# Altium PCB Tailsitter_pcb.PcbDoc
Units mm, origin at the board's own origin, x right, y up, seen from the top; angles counter-clockwise.
Board outline 55.99 x 40.07 mm, 2 copper layers (Top Layer, Bottom Layer); 65 components, 78 nets, 363 pads, 51 vias.
Unrouted connection lines stored in the file: 91.
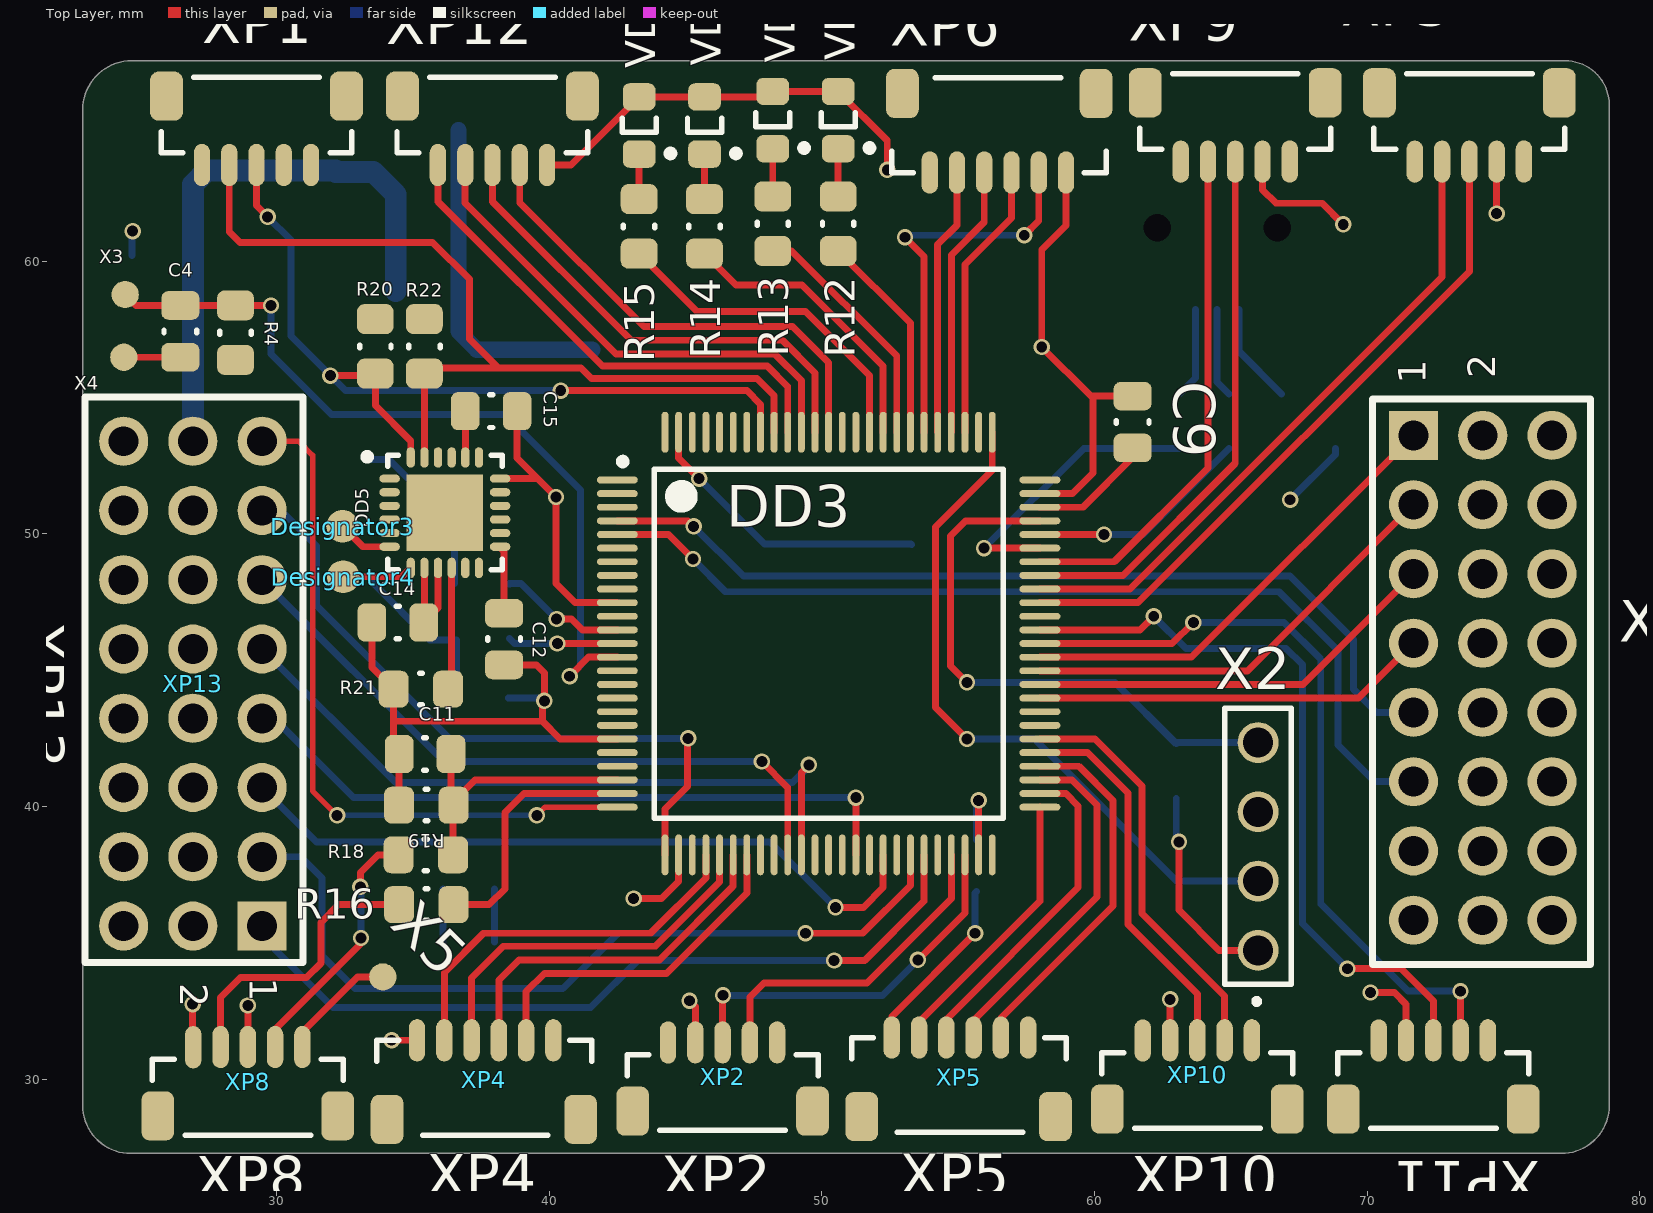
[diagram p0: Top Layer view]
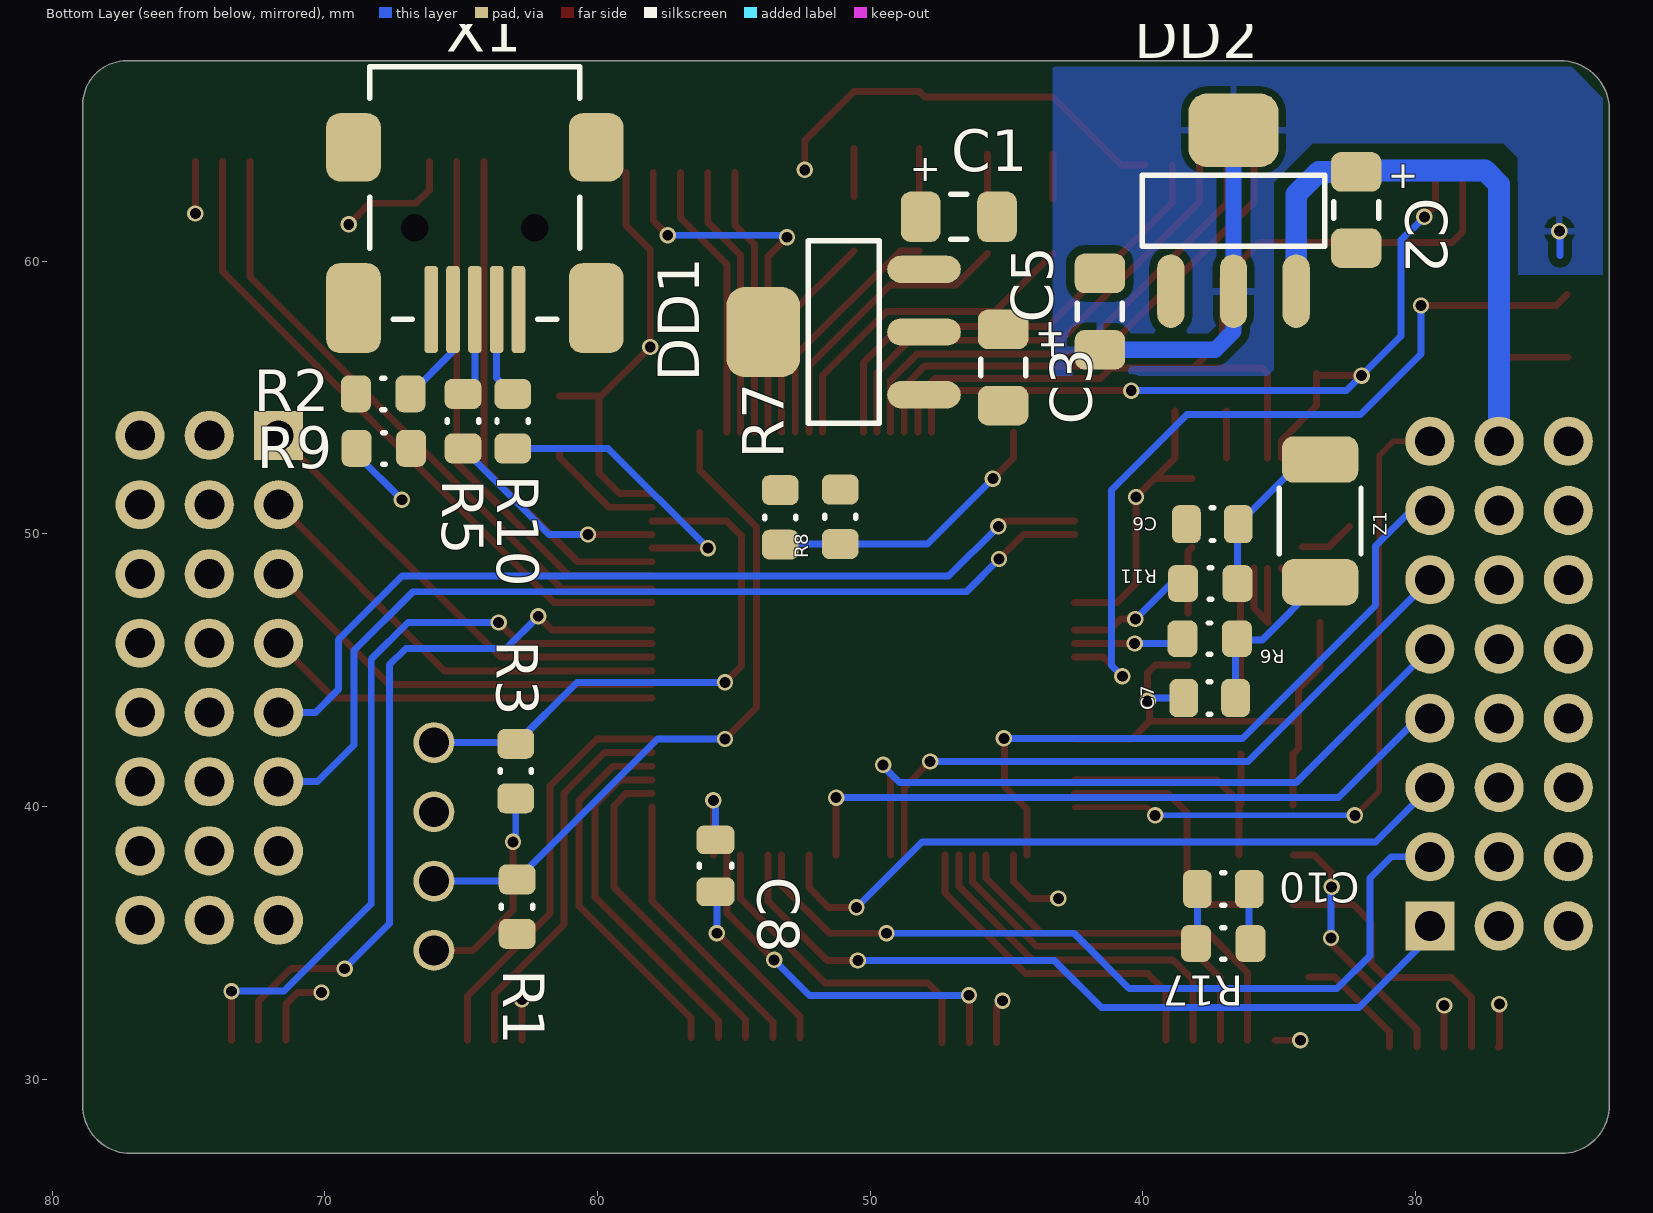
[diagram p1: Bottom Layer view, seen from below]

## Layer stack, top to bottom
Top Solder: solder mask 0.0102, Solder Resist, Dk 3.5
Top Layer: signal copper 0.0356
Dielectric 1: dielectric 0.32, FR-4, Dk 4.8
Bottom Layer: signal copper 0.0356
Bottom Solder: solder mask 0.0102, Solder Resist, Dk 3.5

## Board outline
24.663,27.275 cw(c24.65,29.03) 22.895,29.043 22.9,29.03 22.9,65.556 22.895,65.544 cw(c24.688,65.556) 24.701,67.35 24.688,67.35 77.263,67.35 77.252,67.35 cw(c77.263,65.734) 78.88,65.722 78.875,65.734 78.875,29.03 78.88,29.043 cw(c77.125,29.03) 77.112,27.275 77.125,27.275

## Design rules (kind name [scope] priority, off if disabled: settings)
Clearance Clearance_3 [InNamedPolygon('+5V_Bottom')] p1: gap=0.3 ignorepadtopadclearanceinfootprint=FALSE
Clearance Clearance_2 [InNamedPolygon('Bottom Layer-No Net')] p2: gap=0.15 ignorepadtopadclearanceinfootprint=FALSE
Clearance Clearance_1 [InNamedPolygon('GND_L02_P002')] p3: gap=0.25 ignorepadtopadclearanceinfootprint=FALSE
Clearance My_Clearance_Rules [InNet('No Net')] p4: gap=0.15 ignorepadtopadclearanceinfootprint=FALSE except(0.5: Arc-Fill Arc-Poly Arc-Region Track-Fill Track-Poly Track-Region SMDPad-Fill SMDPad-Poly SMDPad-Region THPad-Fill THPad-Poly THPad-Region Via-Fill Via-Poly Via-Region Fill-Fill Fill-Poly Fill-Region Fill-Hole Poly-Poly Poly-Region Poly-Hole Region-Region Region-Hole)
Clearance [All] p5 off: gap=0.254 ignorepadtopadclearanceinfootprint=FALSE except(0: Arc-Hole Track-Hole SMDPad-Hole THPad-Hole Via-Hole Fill-Hole Poly-Hole Region-Hole Text-Hole)
PolygonConnect [All] p1: connectstyle=Relief reliefconductorwidth=0.254 reliefentries=4 polygonreliefangle="90 Angle" airgapwidth=0.254
RoutingVias [All] p1: holewidth=0.4 width=0.6 viastyle="Through Hole" minholewidth=0.4 minwidth=0.6 maxholewidth=0.4 maxwidth=0.6
SolderMaskExpansion [All] p1: expansion=0.102
Width [InNet('No Net')] p1: maxlimit=0.254 minlimit=0.1 preferedwidth=0.254 toplayer_prefwidth=0.25 bottomlayer_minwidth=0.254 minimp=50.000000 maximp=50.000000 favimp=50.000000
30 further rules are at their usual default settings.

## Classes and differential pairs
component class Designator: C1 C2 C3 C4 C5 C6 C7 C8 C9 C10 C11 DD1 DD2 DD3 R1 R2 R3 R4 R5 R6 R7 R8 R9 R10 R11 R12 R13 R14 R15 R16 R17 R18 R19 VD1 VD2 VD3 VD4 X1 X2 X3 X4 XP1 XP2 XP3 XP4 XP5 XP6 XP7 XP8 XP9 XP10 XP11 XP12 XP13 Z1

## Components (designator, comment, footprint, x,y, rotation, side; value= is the part's Value field where it differs from the comment)
C1 "Cap El Case A (Tantalum)" "CAP CASE A" 46.75,61.625 r180 bottom
C2 "Cap El Case A (Tantalum)" "CAP CASE A" 32.175,61.875 r270 bottom
C3 "Cap El Case A (Tantalum)" "CAP CASE A" 45.125,56.1 r270 bottom
C4 "Cap EIA 0805" "CAP EIA 0805" 26.475,57.425 r90 top
C5 "Cap El Case A (Tantalum)" "CAP CASE A" 41.575,58.15 r90 bottom
C6 "Cap EIA 0805" "CAP EIA 0805" 37.45,50.354 r0 bottom
C7 "Cap EIA 0805" "CAP EIA 0805" 37.55,43.975 r0 bottom
C8 "Cap EIA 0805" "CAP EIA 0805" 55.675,37.825 r90 bottom value=2.2uF
C9 "Cap EIA 0805" "CAP EIA 0805" 61.4,54.1 r270 top value=2.2uF
C10 "Cap EIA 0805" "CAP EIA 0805" 37.05,36.975 r0 bottom value=100nF
C11 "Cap EIA 0805" "CAP EIA 0805" 35.45,41.925 r180 top
C12 "" "CAP EIA 0805" 38.35,46.14 r270 top
C14 "" "CAP EIA 0805" 34.45,46.75 r180 top
C15 "" "CAP EIA 0805" 37.875,54.5 r0 top
DD1 "LM1117S50" SOT-223_M 50.975,57.4 r90 bottom value="Регулятор напряжения LDO 800mA"
DD2 "LM1117S50" SOT-223_M 36.675,61.85 r180 bottom value="Регулятор напряжения LDO 800mA"
DD3 "STM32F407" "LQFP 14x14-100L" 50.25,45.975 r0 top value=Микроконтроллер
DD5 "MPU60x0" "(MPU60X0) QFP24" 36.175,50.775 r0 top
Designator3 "Comment" Pin 32.425,50.275 r0 top
Designator4 "Comment" Pin 32.45,48.425 r0 top
R1 "" "RES EIA 0805" 62.95,36.325 r270 bottom
R2 "Res EIA 0805" "RES EIA 0805" 67.862,55.133 r0 bottom value=100k
R3 "" "RES EIA 0805" 63,41.3 r90 bottom
R4 "Res EIA 0805" "RES EIA 0805" 28.5,57.375 r270 top
R5 "Res EIA 0805" "RES EIA 0805" 64.937,54.133 r270 bottom
R6 "Res EIA 0805" "RES EIA 0805" 37.55,46.154 r0 bottom
R7 "Res EIA 0805" "RES EIA 0805" 53.3,50.6 r90 bottom
R8 "Res EIA 0805" "RES EIA 0805" 51.1,50.625 r90 bottom
R9 "Res EIA 0805" "RES EIA 0805" 67.837,53.133 r180 bottom
R10 "Res EIA 0805" "RES EIA 0805" 63.112,54.133 r270 bottom
R11 "Res EIA 0805" "RES EIA 0805" 37.525,48.175 r0 bottom
R12 "Res EIA 0805" "RES EIA 0805" 50.6,61.375 r90 top value=510
R13 "Res EIA 0805" "RES EIA 0805" 48.2,61.375 r90 top value=510
R14 "Res EIA 0805" "RES EIA 0805" 45.7,61.275 r90 top value=510
R15 "Res EIA 0805" "RES EIA 0805" 43.3,61.275 r90 top value=510
R16 "Res EIA 0805" "RES EIA 0805" 35.5,36.4 r180 top
R17 "Res EIA 0805" "RES EIA 0805" 37.05,34.975 r180 bottom
R18 "Res EIA 0805" "RES EIA 0805" 35.475,38.225 r180 top
R19 "Res EIA 0805" "RES EIA 0805" 35.5,40.05 r0 top
R20 "" "RES EIA 0805" 33.625,56.875 r90 top
R21 "" "RES EIA 0805" 35.296,44.304 r0 top
R22 "" "RES EIA 0805" 35.425,56.875 r270 top
VD1 "KP-2012xxxx" "SMD LED 0805 (GREEN)" 50.6,65.175 r90 top value="Светодиод общего назначения - Цвет: Красный; N: 1; ?1:  645 нм; Iv1: 80 мкд; U: 2.6 В;"
VD2 "KP-2012xxxx" "SMD LED 0805 (GREEN)" 48.2,65.175 r90 top value="Светодиод общего назначения - Цвет: Красный; N: 1; ?1:  645 нм; Iv1: 80 мкд; U: 2.6 В;"
VD3 "KP-2012xxxx" "SMD LED 0805 (GREEN)" 45.7,64.975 r90 top value="Светодиод общего назначения - Цвет: Красный; N: 1; ?1:  645 нм; Iv1: 80 мкд; U: 2.6 В;"
VD4 "KP-2012xxxx" "SMD LED 0805 (GREEN)" 43.3,64.975 r90 top value="Светодиод общего назначения - Цвет: Красный; N: 1; ?1:  645 нм; Iv1: 80 мкд; U: 2.6 В;"
X1 "USB/M-1J" "USB/M-1J (DS1104)" 64.5,61.225 r0 bottom value="Разъем miniUSB (м) на плату"
X2 "" SWD 66.025,38.5 r90 top value="Вилка штыревая 2.54мм 1x4 прям"
X3 "Pin_Referal" "Pin - Referal" 24.45,58.775 r0 top value="Generic Pin Contact Referal"
X4 "Pin_Referal" "Pin - Referal" 24.4,56.475 r0 top value="Generic Pin Contact Referal"
X5 "Pin_Referal" "Pin - Referal" 33.9,33.75 r0 top value="Generic Pin Contact Referal"
XP1 "BM05B-SRSS-TB" BM05B-SRSS-TB 29.266,65.25 r0 top value="Разъем штыревой 5-и контактный угловой"
XP2 "BM05B-SRSS-TB" BM05B-SRSS-TB 46.362,29.625 r180 top value="Разъем штыревой 5-и контактный угловой"
XP3 "BM05B-SRSS-TB" BM05B-SRSS-TB 73.75,65.375 r0 top value="Разъем штыревой 5-и контактный угловой"
XP4 "Micro JST 6 pin" "Micro JST-6 pin" 37.656,29.625 r180 top
XP5 "Micro JST 6 pin" "Micro JST-6 pin" 55.068,29.725 r180 top
XP6 "Micro JST 6 pin" "Micro JST-6 pin" 56.458,65.05 r0 top
XP7 "PLD-24-3" PLD-24-3 71.7,43.45 r90 top
XP8 "BM05B-SRSS-TB" BM05B-SRSS-TB 28.95,29.45 r180 top value="Разъем штыревой 5-и контактный угловой"
XP9 "BM05B-SRSS-TB" BM05B-SRSS-TB 65.164,65.375 r0 top value="Разъем штыревой 5-и контактный угловой"
XP10 "BM05B-SRSS-TB" BM05B-SRSS-TB 63.773,29.7 r180 top value="Разъем штыревой 5-и контактный угловой"
XP11 "BM05B-SRSS-TB" BM05B-SRSS-TB 72.428,29.7 r180 top value="Разъем штыревой 5-и контактный угловой"
XP12 "BM05B-SRSS-TB" BM05B-SRSS-TB 37.921,65.25 r0 top value="Разъем штыревой 5-и контактный угловой"
XP13 "PLD-24-3" PLD-24-3 29.475,45.775 r270 top
Z1 "ABM3-8.000MHZ-D2Y-T" "bq smd 5x3.2" 33.5,50.475 r270 bottom value="8 МГц; PPM25°C: 20 ppm; PPMТраб: 30 ppm; Монтаж: SMD; CНагр: 18 пФ"

## Footprints (in the part's own frame and the unit in brackets; to place one, negate y for a bottom-side part, rotate by r counter-clockwise, add the part's x,y. Pads: shape width x height; smd on the part's side, far side on the other; paste and mask are expansions set on the pad)
"(MPU60X0) QFP24" [mm] "Pattern for moving sensors"
  oval 0.75x0.3 smd: 1(-2.025,1.25) 2(-2.025,0.75) 3(-2.025,0.25) 4(-2.025,-0.25) 5(-2.025,-0.75) 6(-2.025,-1.25) 13(2.025,-1.25) 14(2.025,-0.75) 15(2.025,-0.25) 16(2.025,0.25) 17(2.025,0.75) 18(2.025,1.25)
  oval 0.3x0.75 smd: 7(-1.25,-2.025) 8(-0.75,-2.025) 9(-0.25,-2.025) 10(0.25,-2.025) 11(0.75,-2.025) 12(1.25,-2.025) 19(1.25,2.025) 20(0.75,2.025) 21(0.25,2.025) 22(-0.25,2.025) 23(-0.75,2.025) 24(-1.25,2.025)
  rect 2.8x2.8 smd: 25(0,0)
  silkscreen extent -2.97,-2.1 2.1,2.17, body extent -2.02,-2.02 2.02,2.02, height 0.88
BM05B-SRSS-TB [mm]
  rrect50% 1.2x1.8 smd: 0(-3.3,0.8) 0(3.3,0.8)
  oval 0.6x1.55 smd: 1(-2,-1.725) 2(-1,-1.725) 3(0,-1.725) 4(1,-1.725) 5(2,-1.72)
  silkscreen extent -3.5,-1.28 3.5,1.5, body extent -3.5,-2.07 3.5,1.53, height 4.25
"bq smd 5x3.2" [mm]
  rrect50% 1.7x2.8 smd: 1(-2.25,0) 2(2.25,0)
  silkscreen extent -1.2,-1.5 1.2,1.5, body extent -2.5,-1.61 2.51,1.61, height 1.22
"CAP CASE A" [mm] "Chip Capacitor, 2-Leads, Body 3.20x1.60mm, IPC Medium Density"
  rrect50% 1.45x1.85 smd: 1(-1.4,0) 2(1.4,0)
  silkscreen extent -0.3,-0.82 0.3,0.82, body extent -1.7,-0.8 1.7,0.8, height 1.64
"CAP EIA 0805" [mm] "Chip Capacitor, 2-Leads, Body 2.00x1.25mm, IPC Medium Density"
  rrect50% 1.05x1.4 smd: 1(-0.95,0) 2(0.95,0)
  silkscreen extent -0.05,-0.6 0.05,0.6, body extent -1,-0.62 1,0.62, height 0.78
"LQFP 14x14-100L" [mm] "LQFP, 100-Leads, Body 14,00x14,00mm, Pitch 0,50mm, IPC High Density"
  oval 1.5x0.25 smd: 1(-7.75,6) 2(-7.75,5.5) 3(-7.75,5) 4(-7.75,4.5) 5(-7.75,4) 6(-7.75,3.5) 7(-7.75,3) 8(-7.75,2.5) 9(-7.75,2) 10(-7.75,1.5) 11(-7.75,1) 12(-7.75,0.5) 13(-7.75,0) 14(-7.75,-0.5) 15(-7.75,-1) 16(-7.75,-1.5) 17(-7.75,-2) 18(-7.75,-2.5) 19(-7.75,-3) 20(-7.75,-3.5) 21(-7.75,-4) 22(-7.75,-4.5) 23(-7.75,-5) 24(-7.75,-5.5) 25(-7.75,-6) 51(7.75,-6) 52(7.75,-5.5) 53(7.75,-5) 54(7.75,-4.5) 55(7.75,-4) 56(7.75,-3.5) 57(7.75,-3) 58(7.75,-2.5) 59(7.75,-2) 60(7.75,-1.5) 61(7.75,-1) 62(7.75,-0.5) 63(7.75,0) 64(7.75,0.5) 65(7.75,1) 66(7.75,1.5) 67(7.75,2) 68(7.75,2.5) 69(7.75,3) 70(7.75,3.5) 71(7.75,4) 72(7.75,4.5) 73(7.75,5) 74(7.75,5.5) 75(7.75,6)
  oval 0.25x1.5 smd: 26(-6,-7.75) 27(-5.5,-7.75) 28(-5,-7.75) 29(-4.5,-7.75) 30(-4,-7.75) 31(-3.5,-7.75) 32(-3,-7.75) 33(-2.5,-7.75) 34(-2,-7.75) 35(-1.5,-7.75) 36(-1,-7.75) 37(-0.5,-7.75) 38(0,-7.75) 39(0.5,-7.75) 40(1,-7.75) 41(1.5,-7.75) 42(2,-7.75) 43(2.5,-7.75) 44(3,-7.75) 45(3.5,-7.75) 46(4,-7.75) 47(4.5,-7.75) 48(5,-7.75) 49(5.5,-7.75) 50(6,-7.75) 76(6,7.75) 77(5.5,7.75) 78(5,7.75) 79(4.5,7.75) 80(4,7.75) 81(3.5,7.75) 82(3,7.75) 83(2.5,7.75) 84(2,7.75) 85(1.5,7.75) 86(1,7.75) 87(0.5,7.75) 88(0,7.75) 89(-0.5,7.75) 90(-1,7.75) 91(-1.5,7.75) 92(-2,7.75) 93(-2.5,7.75) 94(-3,7.75) 95(-3.5,7.75) 96(-4,7.75) 97(-4.5,7.75) 98(-5,7.75) 99(-5.5,7.75) 100(-6,7.75)
  silkscreen extent -7.67,-6.4 6.4,6.8, body extent -8,-8 8,8, height 1.6
"Micro JST-6 pin" [mm]
  rrect50% 1.2x1.8 smd: 0(-3.5,1.1) 0(3.6,1.1)
  oval 0.6x1.55 smd: 1(-2.5,-1.8) 2(-1.5,-1.8) 3(-0.5,-1.8) 4(0.5,-1.8) 5(1.5,-1.8) 6(2.5,-1.8)
  silkscreen extent -3.9,-1.8 3.98,1.68, body extent -3.98,-1.8 4.03,1.8, height 4.25
Pin [mm]
  round 1.2 smd: 1(0,0)
"Pin - Referal" [mm]
  round 1 smd mask+0.5: 1(0,0)
PLD-24-3 [mm] "Standart type connector for RC-models"
  rect 1.8x1.8 hole 1.1: 1(10.16,0)
  round 1.8 hole 1.1: 2(7.62,0) 3(5.08,0) 4(2.54,0) 5(0,0) 6(-2.54,0) 7(-5.08,0) 8(-7.62,0) 9(10.16,-2.54) 10(7.62,-2.54) 11(5.08,-2.54) 12(2.54,-2.54) 13(0,-2.54) 14(-2.54,-2.54) 15(-5.08,-2.54) 16(-7.62,-2.54) 17(10.16,-5.08) 18(7.62,-5.08) 19(5.08,-5.08) 20(2.54,-5.08) 21(0,-5.08) 22(-2.54,-5.08) 23(-5.08,-5.08) 24(-7.62,-5.08)
  silkscreen extent -9.25,-6.5 11.5,1.5
"RES EIA 0805" [mm] "Chip Resistor, 2-Leads, Body 2.10x1.30mm, IPC Medium Density"
  rrect50% 1.1x1.35 smd: 1(-1,0) 2(1,0)
  silkscreen extent -0.05,-0.58 0.05,0.57, body extent -1,-0.63 1,0.62, height 0.78
"SMD LED 0805 (GREEN)" [mm]
  rrect50% 1x1.2 smd: 1(-1.05,0) 2(1.05,0)
  silkscreen extent -1.15,-1.27 0.28,0.63, body extent -1.01,-0.62 1.01,0.63, height 1.1
SOT-223_M [mm] "SOT223, 4-Leads, Body 6.5x3.5mm, Pitch 2.3mm, Lead Span 7mm, IPC Low Density"
  oval 1x2.7 smd: 1(-2.3,-2.95) 2(0,-2.95) 3(2.3,-2.95)
  rrect50% 3.3x2.7 smd: 4(0,2.95)
  silkscreen extent -3.35,-1.3 3.35,1.3, body extent -3.25,-3.49 3.25,3.4, height 1.7
SWD [mm]
  round 1.5 hole 1.1: 1(-3.775,0.025) 2(-1.235,0.025) 3(1.305,0.025) 4(3.845,0.025)
  silkscreen extent -5.75,-1.2 5.1,1.25, body extent -5.11,-1.2 5.04,1.34, height 8.54
"USB/M-1J (DS1104)" [mm]
  round 0.9 hole 1: 0(-2.2,0) 0(2.2,0)
  rrect50% 0.5x3.2 smd: 1(-1.6,3) 2(-0.8,3) 3(0,3) 4(0.8,3) 5(1.6,3)
  rrect50% 2x2.5 smd: 6(-4.45,-2.95) 6(4.45,-2.95)
  rrect50% 2x3.3 smd: 6(-4.45,2.95) 6(4.45,2.95)
  silkscreen extent -3.85,-5.9 3.85,3.35, body extent -4.95,-5.9 4.95,3.35, height 4.03

## Part data
C12 C14 C15: library part "Cap EIA 0805", Group=Конденсаторы
DD1 DD2: "LDO Voltage Regulator", Manufacturer="ST Microelectronics", Group=Микросхемы, Name=LM1117S50, Supplier="ООО \"Торгэлектроника\""
DD3: "ARM Cortex-M4 MCU with 1 Mbytes Flash, 168 MHz CPU", Manufacturer=ST, Group=Микросхемы, Name=STM32F407VG, Supplier="ООО\"Торгэлектроника\""
DD5: "6DOF SENSOR"
R1 R3 R20 R21 R22: library part "Res EIA 0805", Group=Резисторы
VD1 VD2 VD3 VD4: library part FYLS-0805xxxx, "SMD Led", Manufacture="Foryard (FORYARD)", Group=Диоды, Name=KP-2012xxxx, Supplier="ООО \"Компэл\""
X1: "Mini USB Receptacle", Manufacturer=Connfly, Group=Разъемы, Name="USB/M-1J (DS1104)", Supplier="ООО\"Торгэлектроника\""
X2: library part "SWD(PLS- 4)", Manufacturer=Тайвань(Китай), Group=Разъемы, Name="PLS- 4", Supplier="ООО\"Торгэлектроника\""
X3 X4 X5: "Generic Pin Contact", Manufacturer=-, Group=-, Name=-, Supplier=-
XP1 XP2 XP3 XP8 XP9 XP10 XP11 XP12: "5-Pin Angle Connector", Manufacturer=JST, Group=Разъемы, Name=BM05B-SRSS-TB, Supplier="ООО\"Компэл\""
XP4 XP5 XP6: library part "Micro JST-6 pin", Group=Разъемы, Производитель=JST
XP7 XP13: "Разъем для подключение RC-приемника или регуляторов хода"
Z1: Manufacturer=ABRACON, Group="Кварцевые резонаторы", Name=ABM3-8.000MHZ-D2Y-T, Supplier="ООО\"Торгэлектроника\""
C1 C2 C3 C4 C5 C6 C7 C8 C9 C10 C11: Group=Конденсаторы
R2 R4 R5 R6 R7 R8 R9 R10 R11 R12 R13 R14 R15 R16 R17 R18 R19: Group=Резисторы

## Via types
v1: diameter 0.6, hole 0.4, Top Layer to Bottom Layer, 51 vias

## Nets (pads, with @x,y where several pads share a name; then routed paths per layer and width w, separated by ;. In a path a pad name is that pad's centre, name@x,y a point inside that pad or via, vN(x,y) a via of type N, cw(c..) or ccw(c..) an arc to the next point about the centre after c; other vN are vias at no path point)
3.3V: C3.1 C12.1 C14.1 DD1.2 DD1.4 DD3.11 DD3.19 DD3.28 DD3.50 DD3.75 DD3.100 DD5.8 DD5.9 DD5.13 R4.2 R7.2 R9.1 R20.2 R22.1 | length 9.2
  Top Layer w0.254: C14.1 C14.1@35.425,46.775 ; DD5.8@35.425,48.721 C14.1@35.425,46.775 ; DD5.9 35.925,47.275 C14.1@35.425,46.775 ; DD5.13@38.2,49.496 38.35,49.346 C12.1
  Bottom Layer w0.254: v1(67.175,51.25) 68.837,52.912 R9.1
ADC_1: C11.1 DD3.23 R18.1 R19.2 | length 10.2
  Top Layer w0.254: C11.1 R19.2@36.4,40.1 ; R18.1 36.475,40.025 R19.2@36.4,40.1 ; DD3.23 37.275,40.975 R19.2@36.4,40.1
ADC_2: C10.1 DD3.24 R16.1 R17.2 | length 11.4
  Top Layer w0.254: R16.1 37.8,36.4 38.375,36.975 38.375,39.775 39.075,40.475 DD3.24
  Bottom Layer w0.254: R17.2@36.075,35 R17.2@36.15,34.925 ; R17.2@36.1,35.025 C10.1
GND: C1.2 C2.2 C3.2 C4.1 C5.2 C6.2 C7.2 C8.1 C9.1 C10.2 C11.2 C12.2 C14.2 C15.2 DD1.1 DD2.1 DD3.10 DD3.20 DD3.27 DD3.74 DD3.94 DD5.1 DD5.18 R1.2 R2.2 R8.2 R17.1 R19.1 R21.1 VD1.2 VD2.2 VD3.2 VD4.2 X1.5 X2.3 X4.1 XP1.4 XP2.4 XP3.4 XP4.6 XP5.6 XP6.6 XP7.17 XP7.18 XP7.19 XP7.20 XP7.21 XP7.22 XP7.23 XP7.24 XP8.3 XP8.5 XP9.4 XP10.4 XP11.4 XP12.5 XP13.17 XP13.18 XP13.19 XP13.20 XP13.21 XP13.22 XP13.23 XP13.24 | length 92.5
  Top Layer w0.254: X4.1 C4.1 ; v1(26.925,32.75) 26.925,31.195 XP8.5 ; XP8.3 v1(28.95,32.7) ; C14.2 33.5,45.1 R21.1 34.296,43.125 ; v1(34.225,31.425) XP4.6 ; R19.1 C11.2 34.296,42.129 34.296,43.125 ; DD5.18 39.575,52.025 ; C12.2 39.535,45.19 39.825,44.9 v1(39.825,43.875) 39.75,43.8 39.75,43.125 ; C15.2 38.825,52.775 39.575,52.025 ; XP12.5 40.805,63.53 VD4.2 48,66.025 VD2.2 VD1.2 52.4,64.425 v1(52.4,63.35) ; DD3.20 40.4,42.475 39.75,43.125 ; DD3.10 40.95,47.475 40.25,48.175 v1(40.25,51.35) 39.575,52.025 ; v1(43.1,36.625) 44.125,36.625 44.75,37.25 DD3.27 ; v1(45.15,32.875) 45.362,32.663 XP2.4 ; XP5.6 52.568,32.293 v1(55.625,35.35) ; DD3.74 59.2,51.475 59.95,52.225 59.95,54.966 59.866,55.05 ; XP6.6 58.958,61.308 58.066,60.416 v1(58.066,56.85) 59.866,55.05 ; C9.1 59.866,55.05 ; XP10.4 62.773,32.923 v1(62.775,32.925) ; XP9.4 66.164,62.611 66.65,62.125 68.35,62.125 v1(69.125,61.35) ; v1(70.125,33.175) 71,33.175 71.428,32.747 XP11.4 ; v1(74.75,61.75) XP3.4 ; 34.296,43.125 39.75,43.125
  Bottom Layer w0.254: R17.1@38,35.025 C10.2 ; C7.2 39.725,43.975 v1(39.825,43.875) ; v1(55.625,35.35) 55.625,36.825 C8.1
LED1: DD3.82 R12.1 | length 7.7
  Top Layer w0.254: R12.1 53.25,57.725 DD3.82
LED2: DD3.83 R13.1 | length 8.9
  Top Layer w0.254: R13.1 48.889,60.375 52.75,56.514 DD3.83
LED3: DD3.84 R14.1 | length 10.7
  Top Layer w0.254: R14.1 46.85,59.125 49.275,59.125 52.25,56.15 DD3.84
LED4: DD3.85 R15.1 | length 12.4
  Top Layer w0.254: R15.1 45.425,58.15 49.4,58.15 51.75,55.8 DD3.85
NetC4_2: C4.2 DD3.14 R4.1 X3.1 | length 29.7
  Top Layer w0.254: X3.1 24.85,58.375 C4.2 R4.1 v1(29.8,58.375) ; v1(40.75,44.775) 41.45,45.475 DD3.14
  Bottom Layer w0.254: v1(29.8,58.375) 29.8,56.6 32.025,54.375 38.375,54.375 41.15,51.6 41.15,45.175 v1(40.75,44.775)
NetC6_1: C6.1 R11.1 Z1.1 | length 6.2
  Bottom Layer w0.254: Z1.1 34.129,52.725 C6.1 36.525,50.329 R11.1
NetC7_1: C7.1 R6.1 Z1.2 | length 6.1
  Bottom Layer w0.254: Z1.2 35.621,46.104 36.6,46.104 C7.1
NetC8_2: C8.2 DD3.49 | length 3.5
  Top Layer w0.254: DD3.49 v1(55.75,40.225)
  Bottom Layer w0.254: C8.2 55.675,40.15 v1(55.75,40.225)
NetC9_2: C9.2 DD3.73 | length 4.5
  Top Layer w0.254: DD3.73 59.575,50.975 61.4,52.8 C9.2
NetC15_1: C15.1 DD5.20 | length 1.7
  Top Layer w0.254: DD5.20@36.925,52.771 DD5.20 C15.1
NetDD3_12: DD3.12 R11.2 | length 4.7
  Top Layer w0.254: v1(40.275,46.875) 40.825,46.875 41.225,46.475 DD3.12
  Bottom Layer w0.254: R11.2@38.55,48.15 R11.2 38.975,48.175 v1(40.275,46.875)
NetDD3_13: DD3.13 R6.2 | length 4
  Top Layer w0.254: v1(40.3,45.975) DD3.13
  Bottom Layer w0.254: R6.2 38.729,45.975 v1(40.3,45.975)
NetDD3_70: DD3.70 R10.2 | length 10.7
  Top Layer w0.254: v1(55.95,49.475) DD3.70
  Bottom Layer w0.254: v1(55.95,49.475) 59.608,53.133 R10.2
NetDD3_71: DD3.71 R5.2 R9.2 | length 8.2
  Top Layer w0.254: DD3.71 v1(60.35,49.975)
  Bottom Layer w0.254: v1(60.35,49.975) 61.779,49.975 R5.2
NetDD3_99: DD3.99 R7.1 R8.1 | length 10.8
  Top Layer w0.254: DD3.99 44.75,52.775 v1(45.5,52.025)
  Bottom Layer w0.254: v1(45.5,52.025) 47.9,49.625 R8.1 53.275,49.625 R7.1
NetDD5_6: DD5.6 Designator3.1 | length 2
  Top Layer w0.254: Designator3.1 33.175,49.525 DD5.6
NetDD5_7: DD5.7 Designator4.1 | length 2.6
  Top Layer w0.254: Designator4.1 34.6,48.425 DD5.7
NetDD5_10: DD5.10 R21.2 | length 4.5
  Top Layer w0.254: R21.2 36.425,44.434 DD5.10@36.425,48.721
NetR2_1: R2.1 X1.4 | length 3.7
  Bottom Layer w0.254: X1.4 65.3,56.695 R2.1
NetR12_2: R12.2 VD1.1 | length 1.8
  Top Layer w0.254: R12.2 VD1.1
NetR13_2: R13.2 VD2.1 | length 1.7
  Top Layer w0.254: R13.2 VD2.1
NetR14_2: R14.2 VD3.1 | length 1.6
  Top Layer w0.254: R14.2 VD3.1
NetR15_2: R15.2 VD4.1 | length 1.7
  Top Layer w0.254: R15.2 VD4.1
NetR16_2: R16.2 XP8.4 | length 10.7
  Top Layer w0.254: XP8.4 27.95,33 28.675,33.725 31.1,33.725 31.625,34.25 31.625,35.75 32.275,36.4 R16.2
NetR18_2: R18.2 XP8.2 | length 9.4
  Top Layer w0.254: XP8.2 29.95,31.825 33.1,34.975 v1(33.1,35.175) ; v1(33.075,37.05) 33.075,37.575 33.725,38.225 R18.2
  Bottom Layer w0.254: v1(33.075,37.05) 33.1,37.025 v1(33.1,35.175)
NetX5_1: X5.1 XP8.1 | length 4.3
  Top Layer w0.254: XP8.1 30.95,31.725 32.975,33.75 X5.1
PA2: DD3.25 XP13.8 | length 26
  Top Layer w0.2: XP13.8 30.805,53.395 31.325,52.875 31.325,40.575 v1(32.225,39.675) ; v1(39.55,39.675) 39.85,39.975 DD3.25
  Bottom Layer w0.2: v1(32.225,39.675) v1(39.55,39.675)
PA3: DD3.26 XP13.7 | length 25
  Top Layer w0.254: DD3.26 44.25,39.9 45.075,40.725 45.075,42.475 v1(45.1,42.5)
  Bottom Layer w0.254: XP13.7 30.17,50.855 31.475,49.55 31.475,47.375 36.35,42.5 v1(45.1,42.5)
PA4: DD3.29 XP4.5 | length 14.4
  Top Layer w0.254: XP4.5 36.156,33.906 37.6,35.35 43.725,35.35 45.75,37.375 DD3.29
PA5: DD3.30 XP4.4 | length 13.8
  Top Layer w0.254: XP4.4 37.156,33.706 38.325,34.875 43.9,34.875 46.25,37.225 DD3.30
PA6: DD3.31 XP4.3 | length 13.4
  Top Layer w0.254: XP4.3 38.156,33.631 38.9,34.375 44.05,34.375 46.75,37.075 DD3.31
PA7: DD3.32 XP4.2 | length 12.8
  Top Layer w0.254: XP4.2 39.156,33.206 39.825,33.875 44.3,33.875 47.25,36.825 DD3.32
PA8: DD3.67 XP3.2 | length 23.7
  Top Layer w0.254: DD3.67 61.3,47.975 72.75,59.425 XP3.2
PA9: DD3.68 XP9.3 | length 19.9
  Top Layer w0.254: DD3.68 61.05,48.475 65.164,52.589 XP9.3
PA10: DD3.69 XP9.2 | length 18.8
  Top Layer w0.254: DD3.69 60.725,48.975 64.164,52.414 XP9.2
PA13: DD3.72 R3.2 X2.4 | length 20.8
  Top Layer w0.254: v1(55.325,44.55) 54.725,45.15 54.725,49.925 55.275,50.475 DD3.72
  Bottom Layer w0.254: v1(55.325,44.55) 60.75,44.55 R3.2 63.045,42.345 X2.4
PA14: DD3.76 R1.1 X2.2 | length 25.4
  Top Layer w0.254: v1(55.325,42.475) 54.175,43.625 54.175,50.25 56.25,52.325 DD3.76
  Bottom Layer w0.254: v1(55.325,42.475) 57.8,42.475 R1.1 63.01,37.265 X2.2
PB0: DD3.35 XP13.6 | length 24.9
  Top Layer w0.254: v1(47.8,41.65) 48.75,40.7 DD3.35
  Bottom Layer w0.254: XP13.6 36.14,41.65 v1(47.8,41.65)
PB1: DD3.36 XP13.5 | length 25.7
  Top Layer w0.254: DD3.36 49.25,41.25 v1(49.525,41.525)
  Bottom Layer w0.254: XP13.5 34.375,40.875 48.925,40.875 v1@49.525,41.475
PB3: DD3.89 XP12.3 | length 18
  Top Layer w0.254: XP12.3 37.921,62.179 43,57.1 48.55,57.1 49.75,55.9 DD3.89
PB4: DD3.90 XP12.2 | length 18.3
  Top Layer w0.254: XP12.2 36.921,62.129 42.45,56.6 48.275,56.6 49.25,55.625 DD3.90
PB5: DD3.91 XP12.1 | length 18.7
  Top Layer w0.254: XP12.1 35.921,62.179 41.95,56.15 48,56.15 48.75,55.4 DD3.91
PB6: DD3.92 DD5.23 R22.2 XP1.2 | length 33.5
  Top Layer w0.254: XP1.2 28.266,61.084 28.661,60.689 35.725,60.689 37.075,59.339 37.075,57.15 38.15,56.075 ; DD5.23@35.425,52.771 DD5.23 R22.2 35.625,56.075 38.15,56.075 ; DD3.92 48.25,55.075 47.625,55.7 41.55,55.7 41.175,56.075 38.15,56.075
PB7: DD3.93 DD5.24 R20.1 XP1.3 | length 31.4
  Top Layer w0.254: XP1.3 29.266,62.034 v1(29.675,61.625) ; v1(31.975,55.8) 33.55,55.8 R20.1 33.625,54.7 34.925,53.4 DD5.24 ; v1(40.425,55.25) 47.25,55.25 47.75,54.75 DD3.93
  Bottom Layer w0.254: v1(29.675,61.625) 30.525,60.775 30.525,57.25 v1(31.975,55.8) 32.525,55.25 v1(40.425,55.25)
PB10: DD3.47 XP2.2 | length 12.1
  Top Layer w0.254: XP2.2 47.362,33.012 47.875,33.525 51.65,33.525 54.75,36.625 DD3.47
PB11: DD3.48 XP2.3 | length 14
  Top Layer w0.254: XP2.3 46.362,33.062 v1(46.375,33.075) ; v1(53.525,34.375) 55.25,36.1 DD3.48
  Bottom Layer w0.254: v1(46.375,33.075) 52.225,33.075 v1(53.525,34.375)
PB12: DD3.51 XP5.5 | length 10.3
  Top Layer w0.254: XP5.5 53.568,32.093 58,36.525 DD3.51
PB13: DD3.52 XP5.4 | length 12.1
  Top Layer w0.254: XP5.4 54.568,32.193 59.4,37.025 59.4,40.025 58.95,40.475 DD3.52
PB14: DD3.53 XP5.3 | length 12.9
  Top Layer w0.254: XP5.3 55.568,32.143 60.1,36.675 60.1,40.05 59.175,40.975 DD3.53
PB15: DD3.54 XP5.2 | length 13.6
  Top Layer w0.254: XP5.2 56.568,32.243 60.675,36.35 60.675,40.225 59.425,41.475 DD3.54
PC6: DD3.63 XP11.2 | length 28.4
  Top Layer w0.254: DD3.63 62.85,45.975 v1(63.625,46.75) ; v1(73.425,33.225) 73.428,33.222 XP11.2
  Bottom Layer w0.254: v1(63.625,46.75) 66.95,46.75 68.3,45.4 68.3,36.425 71.5,33.225 v1(73.425,33.225)
PC7: DD3.64 XP11.3 | length 27.5
  Top Layer w0.254: DD3.64 61.675,46.475 v1(62.175,46.975) ; v1(69.275,34.05) 71.25,34.05 72.428,32.872 XP11.3
  Bottom Layer w0.254: v1(62.175,46.975) 63.35,45.8 67.025,45.8 67.625,45.2 67.625,35.7 v1(69.275,34.05)
PC9: DD3.66 XP3.3 | length 24.8
  Top Layer w0.254: DD3.66 61.6,47.475 73.75,59.625 XP3.3
PC10: DD3.78 XP6.4 | length 10.2
  Top Layer w0.254: DD3.78 55.25,59.875 56.958,61.583 XP6.4
PC11: DD3.79 XP6.3 | length 10
  Top Layer w0.254: DD3.79 54.75,60.225 55.958,61.433 XP6.3
PC12: DD3.80 XP6.2 | length 9.8
  Top Layer w0.254: DD3.80 54.25,60.609 54.958,61.317 XP6.2
PD0: DD3.81 XP6.5 | length 14.4
  Top Layer w0.254: v1(53.05,60.875) 53.75,60.175 DD3.81 ; v1(57.425,60.95) 57.958,61.483 XP6.5
  Bottom Layer w0.254: v1(53.05,60.875) 53.05,60.95 v1(57.425,60.95)
PD7: DD3.88 XP12.4 | length 17.7
  Top Layer w0.254: XP12.4 38.921,62.154 43.475,57.6 48.925,57.6 50.25,56.275 DD3.88
PD8: DD3.55 XP10.3 | length 14
  Top Layer w0.254: DD3.55 59.752,41.975 61.226,40.501 61.226,35.674 63.773,33.127 XP10.3
PD9: DD3.56 XP10.2 | length 15
  Top Layer w0.254: DD3.56 60.025,42.475 61.75,40.75 61.75,36.075 64.773,33.052 XP10.2
PD12: DD3.59 XP7.4 | length 14.5
  Top Layer w0.254: DD3.59 69.685,43.975 XP7.4
PD13: DD3.60 XP7.3 | length 15.4
  Top Layer w0.254: DD3.60 67.645,44.475 XP7.3
PD14: DD3.61 XP7.2 | length 16.2
  Top Layer w0.254: DD3.61 65.605,44.975 XP7.2
PD15: DD3.62 XP7.1 | length 17.1
  Top Layer w0.254: DD3.62 63.565,45.475 XP7.1
PE5: DD3.4 XP7.5 | length 33.6
  Top Layer w0.254: DD3.4 45.1,50.475 v1(45.3,50.275) ; XP7.5@71.375,43.125 XP7.5
  Bottom Layer w0.254: v1(45.3,50.275) 47.125,48.45 67.175,48.45 69.5,46.125 69.5,44.3 70.35,43.45 XP7.5
PE6: DD3.5 XP7.6 | length 35
  Top Layer w0.254: DD3.5 44.375,49.975 v1(45.275,49.075)
  Bottom Layer w0.254: v1(45.275,49.075) 46.475,47.875 66.775,47.875 68.925,45.725 68.925,42.25 70.265,40.91 XP7.6
PE9: DD3.40 XP13.4 | length 25.1
  Top Layer w0.254: DD3.40 v1(51.25,40.325)
  Bottom Layer w0.254: XP13.4 29.915,43.235 32.825,40.325 v1(51.25,40.325)
PE11: DD3.42 XP13.3 | length 26.1
  Top Layer w0.254: v1(50.5,36.3) 51.525,36.3 52.25,37.025 DD3.42
  Bottom Layer w0.254: XP13.3 31.47,38.7 48.1,38.7 v1(50.5,36.3)
PE13: DD3.44 XP13.2 | length 30.1
  Top Layer w0.254: v1(49.4,35.35) 51.5,35.35 53.25,37.1 DD3.44
  Bottom Layer w0.254: XP13.2 30.895,38.155 31.675,37.375 31.675,34.525 32.875,33.325 40.5,33.325 42.525,35.35 v1(49.4,35.35)
PE14: DD3.45 XP13.1 | length 29.1
  Top Layer w0.254: v1(50.45,34.35) 51.575,34.35 53.75,36.525 DD3.45
  Bottom Layer w0.254: XP13.1 29.475,35.225 32.075,32.625 41.525,32.625 43.25,34.35 v1(50.45,34.35)
USB_DM: R10.1 X1.2 | length 3.3
  Bottom Layer w0.254: R10.1 63.7,55.721 X1.2
USB_DP: R5.1 X1.3 | length 3.3
  Bottom Layer w0.254: X1.3 64.5,55.57 R5.1
V_in: C1.1 C2.1 DD1.3 DD2.3 R3.1 X1.1 X2.1 XP7.9 XP7.10 XP7.11 XP7.12 XP7.13 XP7.14 XP7.15 XP7.16 XP13.9 XP13.10 XP13.11 XP13.12 XP13.13 XP13.14 XP13.15 XP13.16 | length 28.6
  Top Layer w0.254: v1(63.1,38.7) 63.1,36.2 64.575,34.725 X2.1
  Bottom Layer w0.254: R3.1 63,38.8 v1(63.1,38.7)
  Bottom Layer w0.8: XP13.16 26.935,62.81 27.45,63.325 C2.1@32.175,63.325 ; C2.1 33.55,63.275 34.375,62.45 DD2.3
VCC_5V: C5.1 DD2.2 DD2.4 XP1.1 XP2.1 XP3.1 XP4.1 XP5.1 XP6.1 XP9.1 XP10.1 XP11.1 | length 13.5
  Bottom Layer w0.254: 24.7,60.2 24.7,61.075 v1(24.725,61.1)
  Bottom Layer w0.6: DD2.4 DD2.2 36.675,57.425 37.35,56.75 C5.1
pads on no net: DD3.1 DD3.2 DD3.3 DD3.6 DD3.7 DD3.8 DD3.9 DD3.15 DD3.16 DD3.17 DD3.18 DD3.21 DD3.22 DD3.33 DD3.34 DD3.37 DD3.38 DD3.39 DD3.41 DD3.43 DD3.46 DD3.57 DD3.58 DD3.65 DD3.77 DD3.86 DD3.87 DD3.95 DD3.96 DD3.97 DD3.98 DD5.2 DD5.3 DD5.4 DD5.5 DD5.11 DD5.12 DD5.14 DD5.15 DD5.16 DD5.17 DD5.19 DD5.21 DD5.22 DD5.25 X1.0 X1.6 XP1.0 XP1.5 XP2.0 XP2.5 XP3.0 XP3.5 XP4.0 XP5.0 XP6.0 XP7.7 XP7.8 XP8.0 XP9.0 XP9.5 XP10.0 XP10.5 XP11.0 XP11.5 XP12.0

## Polygon pours and split planes (outlines as drawn)
VCC_5V on Bottom Layer "+5V_Bottom" (solid, pour order 0): 23.125,59.5 23.125,65.975 24.275,67.125 43.25,67.125 43.3,67.075 43.3,55.8 35.425,55.8 35.2,56.025 35.2,62.9 33.775,64.325 26.775,64.325 26.25,63.8 26.25,59.5

## Silkscreen, mask and mechanical layers (free items; w line width, h text height)
Mechanical 1:
  lines w0.254: 22.895,29.043 ccw(c24.65,29.03) 24.663,27.275 ; 22.895,65.544 cw(c24.688,65.556) 24.701,67.35 ; 22.9,29.03 22.9,65.556 ; 24.65,27.275 77.125,27.275 ; 24.688,67.35 77.263,67.35 ; 77.112,27.275 ccw(c77.125,29.03) 78.88,29.043 ; 77.252,67.35 cw(c77.263,65.734) 78.88,65.722 ; 78.875,29.03 78.875,65.734

## Text inside footprints (layer, text, board x,y; h text height)
C1: Bottom Overlay "+" at 48.55,62.925 h1
C2: Bottom Overlay "+" at 30.875,63.675 h1 r90
C3: Bottom Overlay "+" at 43.825,57.9 h1 r90
C5: Bottom Overlay "+" at 42.875,56.35 h1 r270
XP7: Top Overlay "1" at 72.15,55.5 h1 r90; Top Overlay "2" at 74.7,55.7 h1 r90
XP13: Top Overlay "1" at 29.025,33.725 h1 r270; Top Overlay "2" at 26.475,33.525 h1 r270